# Altium PCB PCB1-ArduinoNano.PcbDoc
Units mm, origin at the board's own origin, x right, y up, seen from the top; angles counter-clockwise.
Board outline 18 x 45 mm, 4 copper layers (Top Layer, Signal Layer Top, Signal Layer Bottom, Bottom Layer), stack 0.603 mm thick; 30 components, 44 nets, 163 pads, 34 vias.
Unrouted connection lines stored in the file: 14.
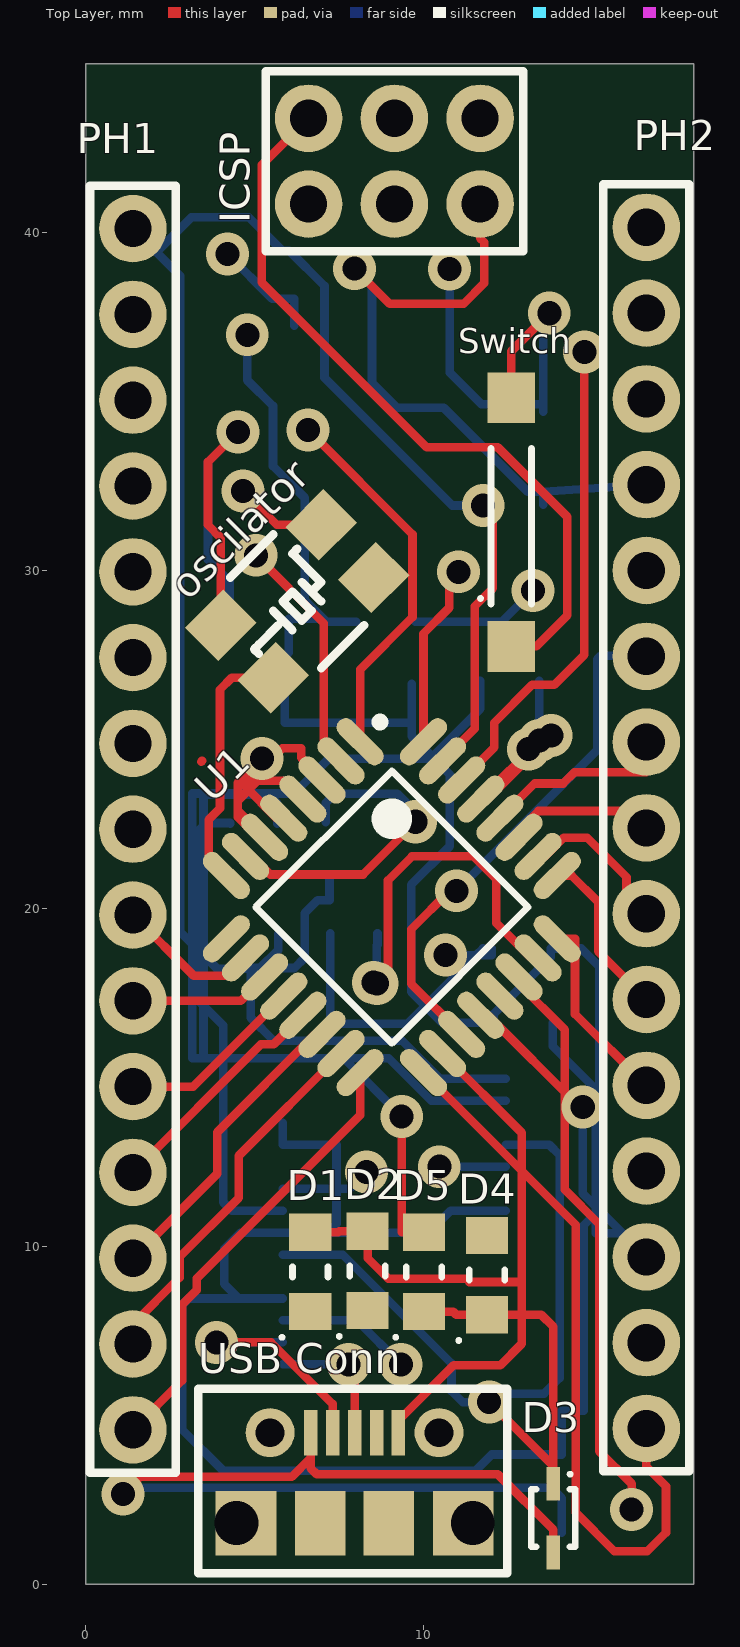
[diagram p0: Top Layer view]
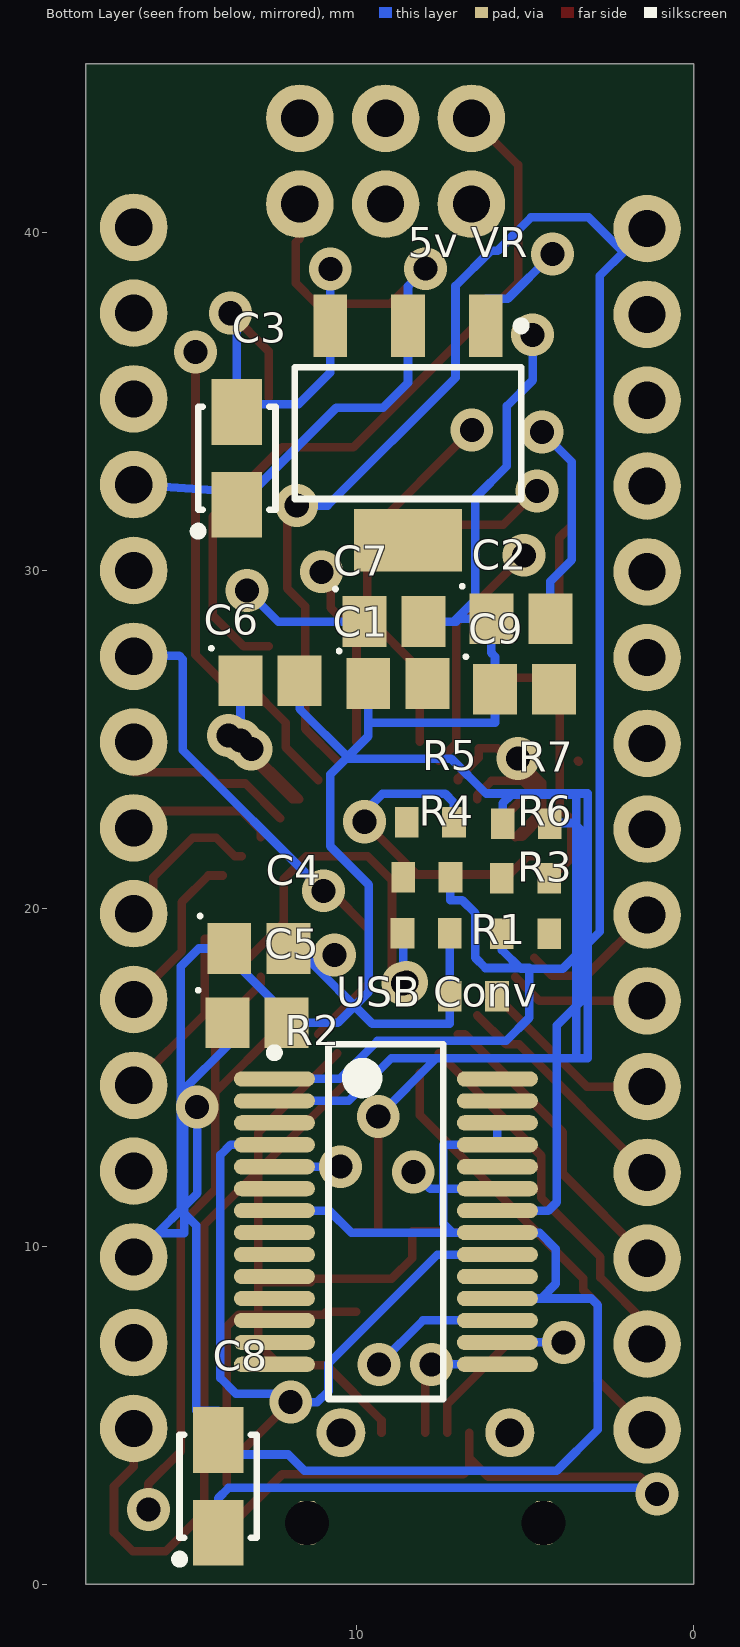
[diagram p1: Bottom Layer view, seen from below]
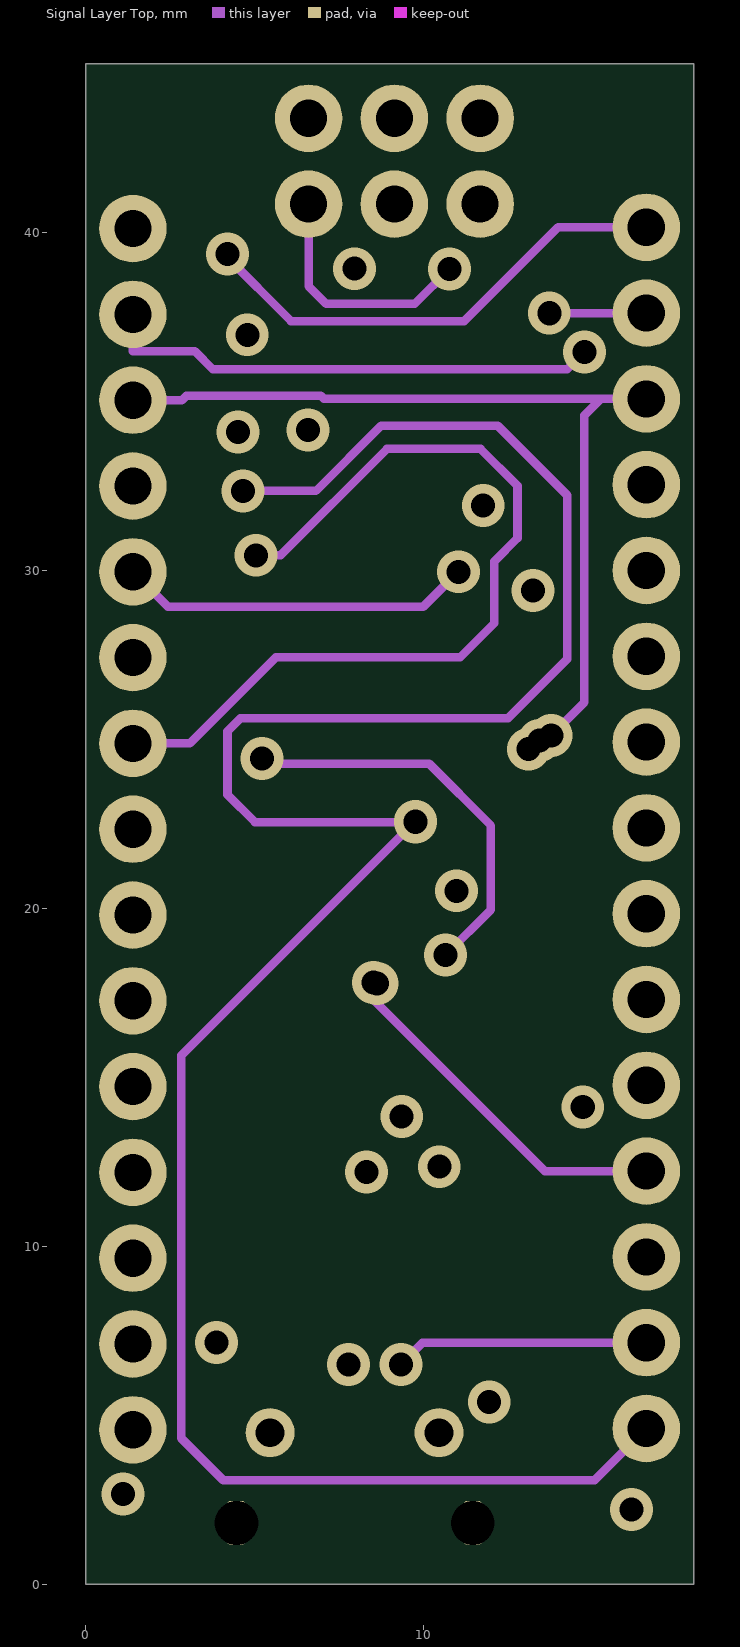
[diagram p2: Signal Layer Top]
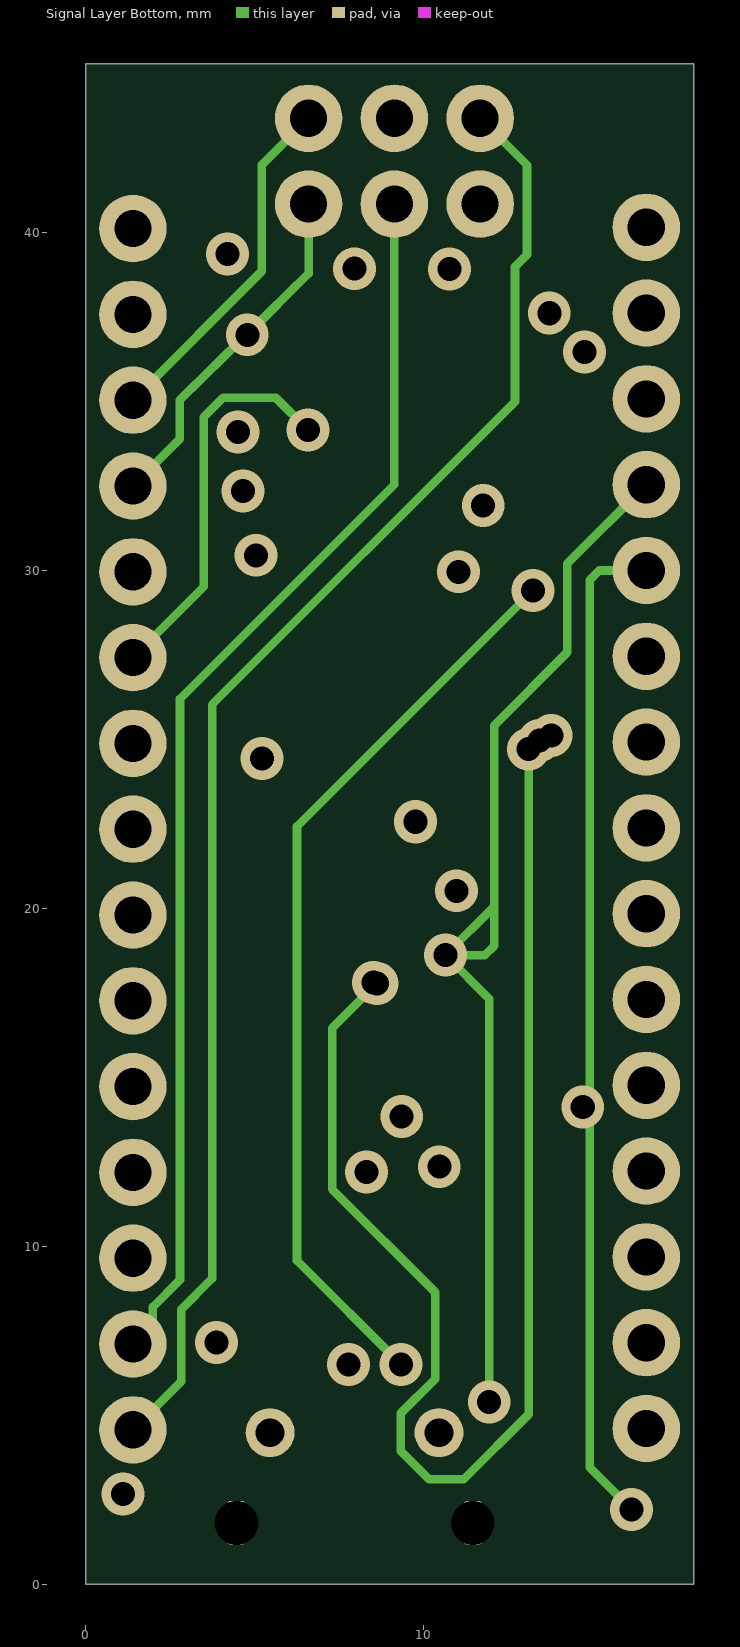
[diagram p3: Signal Layer Bottom]

## Layer stack, top to bottom
Top Solder: solder mask 0.0102, Solder Resist, Dk 3.5
Top Layer: signal copper 0.0356
Dielectric 1: prepreg 0.0711, PP-006, Dk 4.1
Signal Layer Top: signal copper 0.035
Dielectric 3: dielectric 0.32, FR-4, Dk 4.8
Signal Layer Bottom: signal copper 0.035
Dielectric 2: prepreg 0.0711, PP-006, Dk 4.1
Bottom Layer: signal copper 0.0356
Bottom Solder: solder mask 0.0102, Solder Resist, Dk 3.5

## Board outline
0,0 0,45 18,45 18,0

## Design rules (kind name [scope] priority, off if disabled: settings)
Clearance [All] p1: gap=0.254 ignorepadtopadclearanceinfootprint=FALSE
PolygonConnect [All] p1: connectstyle=Relief reliefconductorwidth=0.254 reliefentries=4 polygonreliefangle="90 Angle" airgapwidth=0.254
RoutingVias [All] p1: holewidth=0.711 width=1.27 viastyle="Through Hole" minholewidth=0.711 minwidth=1.27 maxholewidth=0.711 maxwidth=1.27
SolderMaskExpansion [All] p1: expansion=0.102 istentingtop=FALSE
SupplyNets "Schematic Supply Nets_4" [InNet('GND')] p1: voltage=0.000
SupplyNets "Schematic Supply Nets_3" [InNet('VUSB')] p2: voltage=0.000
SupplyNets "Schematic Supply Nets_2" [InNet('3V3')] p3: voltage=0.000
SupplyNets "Schematic Supply Nets_1" [InNet('+5')] p4: voltage=0.000
SupplyNets "Schematic Supply Nets" [InNet('VIN')] p5: voltage=0.000
Width [All] p1: maxlimit=0.254 minlimit=0.254 preferedwidth=0.254
30 further rules are at their usual default settings.

## Components (designator, comment, footprint, x,y, rotation, side; value= is the part's Value field where it differs from the comment)
"5v VR" "LM1117MP-5.0/NOPB, Low Dropout Voltage Regulator, 1.5A, 5 V ±1%, 4-Pin SOT-223" SOT230P700X180-4N 8.467,34.072 r270 bottom
C1 "C0805C180J5GACTU" CAPCP2012X09N 8.767,26.657 r180 bottom
C2 "C0805C180J5GACTU" CAPCP2012X09N 5.124,28.576 r180 bottom
C3 "Capacitor SMT Tantalum" "CASE A - 3216X18" 13.536,33.326 r90 bottom value=4.7µF
C4 "100nF Ceramic Multilayer Capacitor_1" CAPCP2012X09N 12.883,18.815 r180 bottom
C5 "100nF Ceramic Multilayer Capacitor_1" CAPCP2012X09N 12.939,16.618 r180 bottom
C6 "100nF Ceramic Multilayer Capacitor_1" CAPCP2012X09N 12.55,26.741 r180 bottom
C7 "100nF Ceramic Multilayer Capacitor_1" CAPCP2012X09N 8.879,28.493 r180 bottom
C8 "Capacitor SMT Tantalum" "CASE A - 3216X18" 14.085,2.894 r90 bottom value=4.7µF
C9 "100nF Ceramic Multilayer Capacitor_1" CAPCP2012X09N 5.015,26.49 r180 bottom
D1 "(power)Kingbright Blue LED, 60 mcd 120 ° 0805" LED1913X12NBLUE 6.641,9.241 r90 top
D2 "(D13 led) Kingbright Orange LED, 200 mcd 120 ° 0805" LED1913X12NYEL/ORANGE 8.337,9.269 r90 top
D3 "Panasonic DB2J20900L Schottky Diode, 0.5A, 20V, 2.4ns, 2-Pin SMini2 F5 B" DIOM1712X07N 13.832,1.953 r270 top
D4 "(TX)Kingbright Red LED, 100 mcd 120 ° 0805" LED1913X12NRED 11.873,9.148 r90 top
D5 "(RX)Kingbright Green LED, 70 mcd 120 ° 0805" LED1913X12NGREEN 10.006,9.241 r90 top
ICSP "Programming Headers Dual Row" "ISP HEADER" 29.323,29.294 r180 top
oscilator "Aker 16MHz Crystal SMT" "Aker S5C Crystal" 6.96,31.353 r45 top value=16MHz
PH1 "connector;str header;single row;.1 cont centers;.095 tail;gold or gtx;36 contact" Header 1.39,40.127 r270 top
PH2 "connector;str header;single row;.1 cont centers;.095 tail;gold or gtx;36 contact" Header 16.587,40.165 r270 top
R1 "330 (regulator)" RESC1608X55X25NL10T15 6.533,17.405 r180 bottom
R2 "1k" RESC1608X55X25NL10T15 7.931,19.269 r180 bottom
R3 "1k" RESC1608X55X25NL10T15 4.987,19.247 r180 bottom
R4 "1k" RESC1608X55X25NL10T15 7.91,20.92 r180 bottom
R5 "330" RESC1608X55X25NL10T15 7.804,22.551 r180 bottom
R6 "1K" RESC1608X55X25NL10T15 4.987,20.899 r180 bottom
R7 "1K" RESC1608X55X25NL10T15 4.966,22.509 r180 bottom
Switch "Button Tactile Switch, NO 0.05 A 0.8mm" Button8014X17N 12.593,31.313 r90 top
U1 "ATMEGA328P-AU" TQFP80P900X900X120-32N 9.054,20.038 r315 top
"USB Conn" "NewMolex Right Angle SMT Female Type B Micro USB Connector, 30 V ac, 1.8A" MicroUSB 6.721,4.48 r0 top
"USB Conv" "FT232RL, Universal Asynchronous Receiver & Transmitter 3MBd, 28-Pin, SSOP" SOP65P780X200-28N 9.122,10.729 r180 bottom

## Footprints (in the part's own frame and the unit in brackets; to place one, negate y for a bottom-side part, rotate by r counter-clockwise, add the part's x,y. Pads: shape width x height; smd on the part's side, far side on the other; paste and mask are expansions set on the pad)
"Aker S5C Crystal" [mm]
  rect 1.6x1.4 smd: 1(0,0) 2(-4.2,0) 3(0,-2.2) 4(-4.2,-2.2)
  round 0.254 on Top Overlay: 5(-3,-2.4)
  silkscreen extent -4,-3 -1,0.8, body extent -4.7,-2.8 0.5,0.6, height 1
Button8014X17N [mm] "Chip Inductor, 2-Leads, Body 8.00x1.40mm, IPC Medium Density"
  rect 1.5x1.4 smd: 1(-3.556,0) 2(3.81,0)
  silkscreen extent -2.3,-0.6 2.3,0.96, body extent -3.79,-1.92 4.21,1.78, height 2.5
CAPCP2012X09N [mm] "Chip Capacitor, 2-Leads, Body 2.00x1.25mm, IPC Medium Density"
  rect 1.3x1.5 smd: 1(-0.875,0) 2(0.875,0)
  silkscreen extent -1.79,0.91 -1.69,1.01, body extent -1.05,-0.57 0.95,0.68, height 0.78
"CASE A - 3216X18" [mm] "Molded Capacitor, 2-Leads, Body 3.2x1.6mm, IPC Medium Density"
  rect 1.95x1.5 smd: 1(-1.375,0) 2(1.375,0)
  silkscreen extent -2.28,-1.14 1.52,1.27, body extent -1.52,-0.76 1.65,0.84, height 1.77
DIOM1712X07N [mm] "Molded Diode, 2-Leads, Body 1.70x1.25mm, IPC Medium Density"
  rect 1x0.4 smd: 1(-1.016,0) 2(1.016,0)
  silkscreen extent -1.35,-0.65 0.85,0.65, body extent -0.9,-0.45 0.9,0.45, height 0.8
Header [mm] "SIL Header"
  round 2 hole 1.1: 1(0,0) 2(2.54,0) 3(5.08,0) 4(7.62,0) 5(10.16,0) 6(12.7,0) 7(15.24,0) 8(17.78,0) 9(20.32,0) 10(22.86,0) 11(25.4,0) 12(27.94,0) 13(30.48,0) 14(33.02,0) 15(35.56,0)
  silkscreen extent -1.27,-1.27 36.83,1.27, body extent -1.33,-1.35 36.93,1.35, height 8.6
"ISP HEADER" [mm] "SIL Header for programming"
  round 2 hole 1.1: 1(17.653,-14.097) 2(17.653,-11.557) 3(20.193,-14.097) 4(20.193,-11.557) 5(22.733,-14.097) 6(22.733,-11.557)
  silkscreen extent 16.38,-15.49 24,-10.16, body extent 16.38,-15.37 24,-10.29, height 8
LED1913X12NBLUE [mm] "LED 2-Leads, Body 1.90x1.32mm, IPC Medium Density"
  rect 1.1x1.25 smd: 1(-1.175,0) 2(1.175,0)
  silkscreen extent -1.99,-0.52 0.15,0.89, body extent -1,-0.62 1.02,0.62, height 1.1
LED1913X12NGREEN [mm] "LED 2-Leads, Body 1.90x1.32mm, IPC Medium Density"
  rect 1.1x1.25 smd: 1(-1.175,0) 2(1.175,0)
  silkscreen extent -1.99,-0.53 0.15,0.89, body extent -1.01,-0.62 1.01,0.63, height 1.1
LED1913X12NRED [mm] "LED 2-Leads, Body 1.90x1.32mm, IPC Medium Density"
  rect 1.1x1.25 smd: 1(-1.175,0) 2(1.175,0)
  silkscreen extent -1.99,-0.53 0.15,0.89, body extent -1.02,-0.43 1.04,0.47, height 0.85
LED1913X12NYEL/ORANGE [mm] "LED 2-Leads, Body 1.90x1.32mm, IPC Medium Density"
  rect 1.1x1.25 smd: 1(-1.175,0) 2(1.175,0)
  silkscreen extent -1.99,-0.53 0.15,0.89, body extent -1.01,-0.62 1.01,0.63, height 1.1
MicroUSB [mm] "MicroUSB  Molex 5Pin"
  rect 0.4x1.35 smd: 1(-0.07,0) 2(0.58,0) 3(1.23,0) 4(1.88,0) 5(2.53,0)
  rrect50% 0.6x1.3 hole 1.3: ""(-2.27,-2.667) ""(-2.27,-2.667) ""(4.73,-2.667)
  rect 1.8x1.9 smd: ""(-1.98,-2.678) ""(4.45,-2.678)
  round 1.45 hole 0.85: ""(-1.27,0) ""(3.73,0)
  rect 1.5x1.9 smd: ""(0.218,-2.678) ""(2.242,-2.678)
  silkscreen extent -3.39,-4.17 5.75,1.3, body extent -2.83,-5.32 5.37,0.11, height 2.68
RESC1608X55X25NL10T15 [mm] "Chip Resistor, 2-Leads, Body 1.70x0.90mm, IPC Medium Density"
  rect 0.7x0.9 smd: 1(-0.7,0) 2(0.7,0)
  body extent -0.85,-0.45 0.85,0.45, height 0.55
SOP65P780X200-28N [mm] "SOP, 28-Leads, Body 10.20x5.30mm, Pitch 0.65mm, IPC Medium Density"
  oval 2.4x0.45 smd: 1(-3.3,4.225) 2(-3.3,3.575) 3(-3.3,2.925) 4(-3.3,2.275) 5(-3.3,1.625) 6(-3.3,0.975) 7(-3.3,0.325) 8(-3.3,-0.325) 9(-3.3,-0.975) 10(-3.3,-1.625) 11(-3.3,-2.275) 12(-3.3,-2.925) 13(-3.3,-3.575) 14(-3.3,-4.225) 15(3.3,-4.225) 16(3.3,-3.575) 17(3.3,-2.925) 18(3.3,-2.275) 19(3.3,-1.625) 20(3.3,-0.975) 21(3.3,-0.325) 22(3.3,0.325) 23(3.3,0.975) 24(3.3,1.625) 25(3.3,2.275) 26(3.3,2.925) 27(3.3,3.575) 28(3.3,4.225)
  silkscreen extent -3.43,-5.25 1.7,5.25, body extent -3.91,-5.1 3.91,5.1, height 2
SOT230P700X180-4N [mm] "SOT223, 4-Leads, Body 6.50x7.00mm (avg), Pitch 2.30mm, IPC Medium Density"
  rect 1.85x1 smd: 1(-3.175,2.3) 2(-3.175,0) 3(-3.175,-2.3)
  rect 1.85x3.2 smd: 4(3.175,0)
  silkscreen extent -3.3,-3.35 1.95,3.47, body extent -3.8,-3.12 3.29,3.38, height 1.65
TQFP80P900X900X120-32N [mm] "TQFP, 32-Leads, Body 7.00x7.00mm, Pitch 0.80mm, IPC Medium Density"
  oval 1.75x0.55 smd: 1(-4.125,2.8) 2(-4.125,2) 3(-4.125,1.2) 4(-4.125,0.4) 5(-4.125,-0.4) 6(-4.125,-1.2) 7(-4.125,-2) 8(-4.125,-2.8) 17(4.125,-2.8) 18(4.125,-2) 19(4.125,-1.2) 20(4.125,-0.4) 21(4.125,0.4) 22(4.125,1.2) 23(4.125,2) 24(4.125,2.8)
  oval 0.55x1.75 smd: 9(-2.8,-4.125) 10(-2,-4.125) 11(-1.2,-4.125) 12(-0.4,-4.125) 13(0.4,-4.125) 14(1.2,-4.125) 15(2,-4.125) 16(2.8,-4.125) 25(2.8,4.125) 26(2,4.125) 27(1.2,4.125) 28(0.4,4.125) 29(-0.4,4.125) 30(-1.2,4.125) 31(-2,4.125) 32(-2.8,4.125)
  silkscreen extent -4.25,-2.85 2.85,3.75, body extent -4.44,-4.5 4.56,4.5, height 1.6

## Part data
"5v VR": library part LM1117MP-5.0, Manufacturer="Texas Instruments", Maximum Input Voltage=15V, Output Voltage=5V, Supply Current=1.5Amps, Created By="R Kanjee", Datasheet URL=http://za.rs-online.com/web/p/low-dropout-voltage-regulators/5339583/, Date Created="26 February 2015", RS Stock No.=533-9583
C1 C2: library part "18pF Ceramic Multilayer Capacitor, 50 V dc C0G Dielectric ±5% SMD", "18pF Ceramic Multilayer Capacitor, 50 V dc C0G Dielectric ±5% SMD", Capacitance=18pF, Manufacturer=Kemet, Package=0805, Voltage=50V, Creator="Ritesh Kanjee", Datasheet URL=http://za.rs-online.com/web/p/ceramic-multilayer-capacitors/6480935/?searchTerm=C0805C180J5GACTU&relevancy-data=636F3D3226696E3D4931384E4B6E6F776E41734D504E266C753D656E266D6D3D6D61746368616C6C7061727469616C26706D3D5E5B5C707B4C7D5C707B4E647D2D2C2F255C2E5D2B2426706F3D313326736E3D592673743D4D414E5F504152545F4E554D4245522677633D424F5448267573743D4330383035433138304A35474143545526, Date Created="18 February 2015", RS Stock No.=648-0935
C3 C8: library part "4.7µF Tant RS 496-3545", "Capacitor,tantalum,SMT,16V,4.7uF,10%,A-case", Package=3216-18, Tolerance=10%, Voltage=16V, ComponentLink1Description="Supplier Website", ComponentLink1URL=http://za.rs-online.com/web/search/searchBrowseAction.html?method=getProduct&R=4963545, ComponentLink2Description="RS Data sheet", ComponentLink2URL=http://docs-europe.origin.electrocomponents.com/webdocs/04ed/0900766b804ed4cc.pdf, LatestRevisionDate=28-April-2010, Part Originator="H Theron", Publisher=DPSS, RS Stock Nr.=496-3545
C4 C5 C6 C7 C9: "AVX 0805 Standard 100nF Ceramic Multilayer Capacitor, 50 V dc X7R Dielectric ±10% SMD", Capacitance=100nF, Manufacturer=AVX, Package=0805, Voltage=50V, Creator="Ritesh Kanjee", Datasheet URL=http://za.rs-online.com/web/p/ceramic-multilayer-capacitors/4646688/, Date Created="18 February 2015", RS Stock No.=464-6688
D1: library part "Kingbright Blue LED, 60 mcd 120 ° 0805", "Kingbright Blue LED, 60 mcd 120 ° 0805", Color=Blue, Forward Voltage=3.2V, Manufacturer=KingBright, Manufacturer Part No.=KP-2012PBC-A, Creator="Ritesh Kanjee", Datasheet URL=http://za.rs-online.com/web/p/visible-leds/4663784/, Date Created="18 February 2015", RS Stock No.=466-3784
D2: library part "Kingbright Orange LED, 200 mcd 120 ° 0805", "Kingbright Orange LED, 200 mcd 120 ° 0805", Color=Orange, Forward Voltage=1.85V, Manufacturer=KingBright, Manufacturer Part No.=KP-2012SEC, Creator="Ritesh Kanjee", Datasheet URL=http://za.rs-online.com/web/p/visible-leds/4663790/, Date Created="18 February 2015", RS Stock No.=466-3790
D3: library part "Schottky Diode, 0.5A, 20V, 2.4ns, 2-Pin SMini2 F5 B", Manufacturer=Panasonic, Manufacturer Part No.=DB2J20900L, Maximum Continuous Forward Current=0.5A, Peak Reverse Repetitive Voltage=20V, Created By="R Kanjee", Datasheet=http://docs-europe.electrocomponents.com/webdocs/1398/0900766b813986b3.pdf, Date Created="1 March 2015", RS Stock No.=713-2703
D4: library part "Kingbright Red LED, 100 mcd 120 ° 0805", "Kingbright Red LED, 100 mcd 120 ° 0805", Color=RED, Forward Voltage=1.85V, Manufacturer=KingBright, Manufacturer Part No.=KP-2012SRC-PRV, Creator="Ritesh Kanjee", Datasheet URL=http://za.rs-online.com/web/p/visible-leds/4663813/, Date Created="18 February 2015", RS Stock No.=466-3813
D5: library part "Kingbright Green LED, 70 mcd 120 ° 0805", "Kingbright Green LED, 70 mcd 120 ° 0805", Color=Green, Forward Voltage="2.1 V", Manufacturer=KingBright, Manufacturer Part No.=KP-2012MGC, Creator="Ritesh Kanjee", Datasheet URL=http://za.rs-online.com/web/p/visible-leds/4663778/, Date Created="18 February 2015", RS Stock No.=466-3778
ICSP: library part "Programming ISP, Programming Headers Dual Row", Current Rating="3Amps Continuous", Manufacturer=FCI, Manufacturer Part No.=68000-236HLF, Created By="R Kanjee", Date Created="1 March 2015", RS Stock No.=2509565626
oscilator: library part "Aker  C5S-16.000-12-3030-X", "Aker S5C SMT Crystal", Frequency Stability=+/-30ppm, Load Capacitance=12pF, Manufacturer=Aker, Manufacturer Part #=C5S-16.000-12-3030-X, Package="3.2x5mm SMD", Creator="R Kanjee", HelpURL=http://za.rs-online.com/web/p/crystal-units/6719488/, RS="RS 671-9488", RS Stock Nr.=671-9488, Supplier=RS
PH1 PH2: library part "Single row; PCB headers", Current Rating="3Amps Continuous", Manufacturer=FCI, Manufacturer Part No.=68000-236HLF, Created By="R Kanjee", Date Created="1 March 2015", RS Stock No.=2509565626
R1 R5: library part CMP-2100-03667-1, "Chip Resistor, 0 Ohm, +/- 5%, 0.1 W, -55 to 155 degC, 0603 (1608 Metric), RoHS, Tape and Reel", Case Code (Imperial)=0603, Case Code (Metric)=1608, Manufacturer=Yageo, Max Operating Temperature=155degC, Min Operating Temperature=-55degC, Package Description="2-Pin Surface Mount Device, Body 1.6 x 0.8 mm", Package Quantity=5000, Power Rating=100mW, Resistance=330mOhm, Temperature Coefficient=200ppm/degreesC, Tolerance=5%, Voltage Rating=50V, Case/Package=0603, Composition=ThickFilm, Contact Plating=Tin, Datasheet URL=http://www.yageo.com/NewPortal/yageodocoutput?fileName=/pdf/R-Chip/PYu-RC_Group_51_RoHS_L_5.pdf, Datasheet Version="Rev. 5, 10/2016", Depth=0.8mm, Height=0.45mm, Lead Free=LeadFree, Length=1.6mm, Manufacturer URL=http://www.yageo.com/, Military Standard=Not, Number of Pins=2, Package Reference=0603, Packaging=TapeandReel, Radiation Hardening=No, REACH SVHC=NoSVHC, RoHSCompliant=true, Termination=SMD/SMT, Voltage Rating (DC)=50V, Width=0.8mm
R2 R3 R4: library part CMP-2100-03667-1, "Chip Resistor, 0 Ohm, +/- 5%, 0.1 W, -55 to 155 degC, 0603 (1608 Metric), RoHS, Tape and Reel", Case Code (Imperial)=0603, Case Code (Metric)=1608, Manufacturer=Yageo, Max Operating Temperature=155degC, Min Operating Temperature=-55degC, Package Description="2-Pin Surface Mount Device, Body 1.6 x 0.8 mm", Package Quantity=5000, Power Rating=100mW, Resistance=1K, Temperature Coefficient=200ppm/degreesC, Tolerance=5%, Voltage Rating=50V, Case/Package=0603, Composition=ThickFilm, Contact Plating=Tin, Datasheet URL=http://www.yageo.com/NewPortal/yageodocoutput?fileName=/pdf/R-Chip/PYu-RC_Group_51_RoHS_L_5.pdf, Datasheet Version="Rev. 5, 10/2016", Depth=0.8mm, Height=0.45mm, Lead Free=LeadFree, Length=1.6mm, Manufacturer URL=http://www.yageo.com/, Military Standard=Not, Number of Pins=2, Package Reference=0603, Packaging=TapeandReel, Radiation Hardening=No, REACH SVHC=NoSVHC, RoHSCompliant=true, Termination=SMD/SMT, Voltage Rating (DC)=50V, Width=0.8mm
R6 R7: library part CMP-2100-03667-1, "Chip Resistor, 0 Ohm, +/- 5%, 0.1 W, -55 to 155 degC, 0603 (1608 Metric), RoHS, Tape and Reel", Case Code (Imperial)=0603, Case Code (Metric)=1608, Manufacturer=Yageo, Max Operating Temperature=155degC, Min Operating Temperature=-55degC, Package Description="2-Pin Surface Mount Device, Body 1.6 x 0.8 mm", Package Quantity=5000, Power Rating=100mW, Temperature Coefficient=200ppm/degreesC, Tolerance=5%, Voltage Rating=50V, Case/Package=0603, Composition=ThickFilm, Contact Plating=Tin, Datasheet URL=http://www.yageo.com/NewPortal/yageodocoutput?fileName=/pdf/R-Chip/PYu-RC_Group_51_RoHS_L_5.pdf, Datasheet Version="Rev. 5, 10/2016", Depth=0.8mm, Height=0.45mm, Lead Free=LeadFree, Length=1.6mm, Manufacturer URL=http://www.yageo.com/, Military Standard=Not, Number of Pins=2, Package Reference=0603, Packaging=TapeandReel, Radiation Hardening=No, REACH SVHC=NoSVHC, Resistance=1K, RoHSCompliant=true, Termination=SMD/SMT, Voltage Rating (DC)=50V, Width=0.8mm
Switch: Manufacturer="C & K", Manufacturer Part No.=B3F1000, Creator="R Kanjee", Date Created="25 February 2015", RS Stock No.=516-255, State="Normaly Open"
U1: "ATMEGA328P-AU, 8 bit AVR Microcontroller 20MHz 1 kB, 32 kB Flash, 2 kB RAM, I2C 32-Pin TQFP", Company="Lumina Inova", Created By="Ritesh Kanjee", Datasheet URL=http://docs-europe.electrocomponents.com/webdocs/0db4/0900766b80db4deb.pdf, Date Created="14 February 2015", RS Stock No.=696-3092
"USB Conn": library part "Micro USB Connector, 30 V ac, 1.8A", Manufacturer=Molex, Manufacturer Part No.=105017-0001, Max Current=1.8A, Max Voltage=30V, Creator="R Kanjee", Datasheet URL=http://za.rs-online.com/web/p/micro-usb-connectors/8486764/, Date Created="28 February 2015", RS Stock No=848-6764
"USB Conv": library part "FT232RL USB to UART, Universal Asynchronous Receiver & Transmitter 3MBd, 28-Pin, SSOP", Manufacturer="FTDI Chip", Manufacturer Part No.=FT232RL, Creator="R Kanjee", Date Created="03 March 2015", Pin Count=28, RS Stock No.=406-580

## Via types
v1: diameter 1.27, hole 0.711, Top Layer to Bottom Layer, 34 vias

## Nets (pads, with @x,y where several pads share a name; then routed paths per layer and width w, separated by ;. In a path a pad name is that pad's centre, name@x,y a point inside that pad or via, vN(x,y) a via of type N, cw(c..) or ccw(c..) an arc to the next point about the centre after c; other vN are vias at no path point)
3V3: "USB Conv.17" C7.1 PH2.14 | length 42.5
  Signal Layer Top w0.254: v1(9.322,6.504) 9.963,7.145 PH2.14
  Signal Layer Bottom w0.254: v1(9.322,6.504) 6.248,9.577 6.248,22.428 v1(13.233,29.413)
  Bottom Layer w0.254: 5.822,7.804 8.022,7.804 v1(9.322,6.504) ; C7.1 12.313,28.493 v1(13.233,29.413)
+5: "5v VR.2" "USB Conv.4" "USB Conv.20" C3.1 C4.2 D3.1 D4.1 D5.1 ICSP.2 PH2.4 R1.1 R2.2 U1.4 U1.6 U1.18 | length 121
  Top Layer w0.254: v1(5.207,24.435) 4.496,23.724 4.496,23.19 ; U1.4 6.42,23.348 5.994,23.774 5.08,23.774 4.496,23.19 ; v1(7.95,38.938) 8.992,37.897 11.176,37.897 11.786,38.506 11.786,39.726 11.67,39.841 ICSP.2 ; D5.1 10.871,8.066 10.964,7.973 D4.1 12.903,7.973 ; U1.18 12.903,13.361 12.903,7.973 ; v1(11.938,5.385) 13.832,3.49 ; D3.1 13.832,3.49 ; 4.496,22.9 4.496,23.19 ; 4.496,22.9 4.496,22.708 5.08,22.123 U1.6@5.272,22.123 ; 4.496,22.9 U1.6@5.272,22.123 ; U1.6@5.272,22.123 5.289,22.123 U1.6 U1.6@5.272,22.123 ; 12.903,7.973 13.48,7.973 13.832,7.62 13.832,3.49
  Signal Layer Top w0.254: v1(5.207,24.435) 5.207,24.282 10.16,24.282 11.989,22.454 11.989,19.964 v1(10.643,18.618)
  Signal Layer Bottom w0.254: v1(11.938,5.385) 11.938,17.323 v1(10.643,18.618) ; PH2.4 14.249,30.208 14.249,27.584 12.09,25.425 12.09,20.066 ; v1(10.643,18.618) 12.09,20.066 ; v1(10.643,18.618) 11.811,18.618 12.09,18.898 12.09,20.066
  Bottom Layer w0.254: 5.822,9.754 7.595,9.754 10.82,6.528 10.82,5.715 11.151,5.385 v1(11.938,5.385) 12.192,5.639 13.564,5.639 14.021,6.096 14.021,12.7 13.717,13.004 12.422,13.004 ; R2.2 7.231,18.756 7.233,18.753 R1.1 7.233,16.586 9.525,16.586 C4.2@11.557,18.618 ; v1(7.95,38.938) 8.467,38.422 8.467,37.247 8.467,35.56 9.203,34.823 10.592,34.823 13.08,32.335 C3.1@13.536,32.335 ; v1(10.643,18.618) C4.2@11.557,18.618 ; C4.2 12.008,18.618 C4.2@11.753,18.618 ; C3.1 C3.1@13.536,32.335 ; PH2.4 C3.1@13.536,32.335 ; C4.2@11.557,18.618 11.753,18.815 C4.2@11.753,18.618 ; C4.2@11.557,18.618 C4.2@11.753,18.618
A0: PH2.12 U1.23 | length 20.6
  Top Layer w0.254: v1(8.509,17.805) 8.941,18.237 8.941,20.828 9.652,21.539 11.481,21.539 12.147,20.873 12.147,19.57 13.182,18.536 U1.23
  Signal Layer Top w0.254: v1(8.509,17.805) 8.509,17.297 13.581,12.225 PH2.12
A1: PH2.11 U1.24 | length 5.7
  Top Layer w0.254: U1.24 14.478,19.101 14.478,16.874 PH2.11
A2: PH2.10 U1.25 | length 5
  Top Layer w0.254: U1.25 14.375,20.975 15.164,20.187 15.164,18.728 PH2.10
A3: PH2.9 U1.26 | length 5
  Top Layer w0.254: U1.26 13.589,21.541 14.146,22.098 14.834,22.098 16.002,20.93 16.002,19.845 PH2.9
A4: PH2.8 U1.27 | length 4.4
  Top Layer w0.254: U1.27 12.82,22.31 13.395,22.885 16.087,22.885 PH2.8
A5: PH2.7 U1.28 | length 5.8
  Top Layer w0.254: U1.28 13.28,23.698 14.122,23.698 14.453,24.028 16.587,24.028 PH2.7
A6: PH2.6 U1.19 | length 15.6
  Top Layer w0.254: v1(10.973,20.523) 10.769,20.523 9.627,19.381 9.627,17.769 U1.19
  Bottom Layer w0.254: v1(10.973,20.523) 15.138,24.689 15.138,27.381 15.24,27.483 16.587,27.483 PH2.6
A7: PH2.5 U1.22 | length 47
  Top Layer w0.254: U1.22 12.82,17.766 14.173,16.413 14.173,11.678 15.189,10.662 15.189,3.934 16.154,2.968 v1(16.154,2.21)
  Signal Layer Bottom w0.254: v1(16.154,2.21) 14.91,3.454 14.91,29.718 15.197,30.005 PH2.5
AREF: C5.1 PH2.13 U1.20 | length 16.9
  Top Layer w0.254: U1.20 11.892,16.839 14.608,14.122 v1(14.707,14.122)
  Bottom Layer w0.254: C5.1 13.814,15.926 15.088,14.652 15.088,11.185 ; v1(14.707,14.122) 14.707,11.566 15.088,11.185 ; PH2.13 PH2.13@15.884,10.389 ; 15.088,11.185 15.088,10.389 PH2.13@15.884,10.389 ; 15.088,11.185 PH2.13@15.884,10.389
D0/Rx: PH1.2 R4.1 U1.30 | length 29.5
  Top Layer w0.254: U1.30 12.09,24.771 12.09,25.502 13.208,26.619 13.868,26.619 14.757,27.508 v1(14.757,36.474)
  Signal Layer Top w0.254: PH1.2 1.39,36.5 3.221,36.5 3.762,35.959 14.242,35.959 v1(14.757,36.474)
D1/Tx: PH1.1 R3.1 U1.31 | length 49.2
  Top Layer w0.254: U1.31 11.506,25.319 11.506,28.94 12.04,29.473 12.04,31.928 v1(11.76,31.928)
  Bottom Layer w0.254: PH1.1 PH1.1@2.045,39.472 ; R3.1 5.687,18.771 5.129,18.212 3.886,18.212 2.794,19.304 2.794,38.723 PH1.1@2.045,39.472 ; v1(11.76,31.928) 10.846,31.928 7.061,35.712 7.061,38.43 6.02,39.472 5.811,39.472 4.825,40.458 3.119,40.458 2.132,39.472 PH1.1@2.045,39.472
D2: PH1.5 U1.32 | length 16
  Top Layer w0.254: U1.32 9.991,28.138 10.757,28.903 10.757,29.7 v1(11.024,29.967)
  Signal Layer Top w0.254: PH1.5 2.426,28.931 9.988,28.931 v1(11.024,29.967)
D3: PH1.6 U1.1 | length 22.9
  Top Layer w0.254: v1(6.579,34.163) 9.667,31.074 9.667,28.626 8.117,27.076 U1.1
  Signal Layer Bottom w0.254: PH1.6 3.482,29.519 3.482,34.544 4.059,35.121 5.621,35.121 v1(6.579,34.163)
D4: PH1.7 U1.2 | length 33.2
  Top Layer w0.254: v1(5.029,30.455) 7.036,28.448 7.036,24.885 U1.2
  Signal Layer Top w0.254: PH1.7 3.071,24.887 5.616,27.432 11.074,27.432 12.09,28.448 12.09,30.277 12.776,30.963 12.776,32.512 11.684,33.604 8.912,33.604 5.763,30.455 v1(5.029,30.455)
D5: PH1.8 U1.9 | length 0
  Top Layer w0.254: 3.411,24.342 ccw(c3.232,24.523) 3.435,24.369
D6: PH1.9 U1.10 | length 4.3
  Top Layer w0.254: PH1.9 3.188,18.009 4.196,18.009 U1.10
D7: PH1.10 U1.11 | length 4.2
  Top Layer w0.254: PH1.10 4.586,17.267 U1.11
D8: PH1.11 U1.12 | length 5.6
  Top Layer w0.254: PH1.11 3.177,14.727 U1.12
D9: PH1.12 U1.13 | length 7
  Top Layer w0.254: PH1.12 5.181,15.978 5.559,15.978 U1.13
D10: PH1.13 U1.14 | length 9.1
  Top Layer w0.254: PH1.13 3.886,12.143 3.886,13.377 6.783,16.273 U1.14
D11/MOSI: ICSP.4 PH1.14 U1.15 | length 48.1
  Top Layer w0.254: PH1.14 1.39,7.694 2.771,9.075 2.771,9.68 4.521,11.43 4.521,12.677 U1.15
  Signal Layer Bottom w0.254: PH1.14 1.981,7.698 1.981,8.204 2.784,9.007 2.784,26.203 9.13,32.549 ICSP.4
D12/MISO: ICSP.1 PH1.15 U1.16 | length 57.6
  Top Layer w0.254: PH1.15 2.845,6.021 2.845,8.268 3.279,8.703 3.279,9.045 8.117,13.883 U1.16
  Signal Layer Bottom w0.254: PH1.15 2.819,5.996 2.819,8.128 3.734,9.042 3.734,26.035 12.7,35.001 12.7,38.996 13.056,39.352 13.056,42.006 ICSP.1
D13/SCK: ICSP.3 PH2.15 R5.2 U1.17 | length 61.5
  Top Layer w0.254: U1.17 14.503,10.629 14.503,2.108 15.646,0.965 16.612,0.965 17.17,1.524 17.17,2.896 16.587,3.48 PH2.15
  Signal Layer Top w0.254: v1(9.754,22.581) 2.819,15.646 2.819,4.318 4.064,3.073 15.055,3.073 PH2.15
  Bottom Layer w0.254: R5.2 7.104,23.131 7.366,23.393 9.22,23.393 9.754,22.86 v1(9.754,22.581)
GND: "5v VR.3" "USB Conn.5" "USB Conv.7" "USB Conv.18" "USB Conv.21" "USB Conv.25" "USB Conv.26" C1.1 C2.1 C3.2 C4.1 C5.2 C7.2 C8.2 C9.1 D1.2 D2.2 ICSP.6 PH1.4 PH2.2 Switch.2 U1.3 U1.5 U1.21 | length 139.9
  Top Layer w0.254: U1.5 5.651,22.672 4.699,23.624 5.814,24.74 6.375,24.74 6.375,24.46 6.986,23.85 U1.3 ; D1.2 7.468,10.416 7.495,10.444 D2.2 8.337,9.652 8.947,9.042 11.252,9.042 11.354,8.941 12.903,8.941 12.903,7.112 12.268,6.477 10.884,6.477 9.251,4.844 9.251,4.48 ; Switch.2 12.593,36.496 v1(13.716,37.62)
  Signal Layer Top w0.254: ICSP.6 6.59,38.419 7.112,37.897 9.729,37.897 v1(10.767,38.934) ; v1(13.716,37.625) PH2.2
  Signal Layer Bottom w0.254: PH1.4 2.771,33.888 2.771,35.045 4.759,36.998 6.59,38.797 ; v1(4.775,36.982) 6.59,38.797 ; ICSP.6 6.59,38.797
  Bottom Layer w0.254: v1(4.775,36.982) 4.775,35.636 5.537,34.874 5.537,33.096 6.477,32.156 6.477,29.128 7.112,28.493 ; 5.822,8.454 4.526,8.454 ; 5.822,13.654 5.822,13.004 7.417,13.004 7.417,10.668 7.153,10.404 ; C7.2 7.112,28.493 ; C1.1 9.642,25.502 ; v1(10.767,38.934) 10.767,37.247 10.767,35.865 11.707,34.925 C3.2@13.536,34.925 ; 12.422,11.054 10.795,11.054 10.145,10.404 7.153,10.404 ; C3.2 C3.2@13.536,34.925 ; v1(13.716,37.62) v1@13.536,37.439 ; v1(13.716,37.625) 13.536,37.445 v1@13.536,37.439 ; 4.526,8.454 3.044,8.454 2.845,8.255 2.845,4.572 4.064,3.353 11.532,3.353 12.014,3.835 14.085,3.835 C8.2 14.085,5.131 14.732,5.131 14.732,10.617 15.189,11.074 15.189,18.288 14.663,18.815 C4.1 13.758,18.56 12.064,16.866 C5.2 10.542,16.618 9.627,17.533 9.627,20.701 10.77,21.844 10.77,23.968 9.642,25.095 9.642,25.502 ; 4.526,8.454 4.089,8.89 4.089,9.921 4.572,10.404 5.822,10.404 7.153,10.404 ; 7.112,28.493 7.043,28.493 6.96,28.576 C2.1 5.999,27.567 5.89,27.457 C9.1 5.89,25.502 9.642,25.502 ; C3.2@13.536,34.925 v1@13.536,37.439
NetC1_2: C1.2 oscilator.3
NetC2_2: C2.2 oscilator.2 | length 12.4
  Top Layer w0.254: oscilator.2 3.99,30.976 3.613,31.353 3.613,33.22 v1(4.498,34.105)
  Bottom Layer w0.254: C2.2 4.249,29.685 3.613,30.321 3.613,33.22 v1(4.498,34.105)
NetC6_2: "USB Conv.2" C6.2 | length 28
  Bottom Layer w0.254: C6.2 11.675,25.908 10.201,24.435 7.188,24.435 6.156,23.402 3.15,23.402 3.15,15.57 8.959,15.57 10.225,14.304 12.422,14.304
NetD1_1: D1.1 R1.2
NetD2_1: D2.1 R5.1
NetD4_2: D4.2 R6.1
NetD5_2: D5.2 R7.1 | length 21.4
  Top Layer w0.254: v1(9.347,13.843) 9.347,10.416 D5.2
  Bottom Layer w0.254: R7.1 5.666,23.114 5.412,23.368 3.48,23.368 3.48,15.57 7.62,15.57 v1(9.347,13.843)
NetR6_2: "USB Conv.23" R6.2 | length 2.7
  Bottom Layer w0.254: 5.822,11.704 7.812,11.704 v1(8.31,12.202)
NetR7_2: "USB Conv.22" R7.2 | length 14.2
  Bottom Layer w0.254: R7.2 4.266,22.53 3.556,22.53 3.302,22.276 3.302,17.297 4.064,16.535 4.064,11.303 4.313,11.054 5.822,11.054
"NetUSB Conn_2": "USB Conn.2" "USB Conv.16" | length 7
  Top Layer w0.254: v1(3.861,7.154) 5.482,7.154 7.301,5.334 7.301,4.48
  Bottom Layer w0.254: v1(3.861,7.154) 5.822,7.154
"NetUSB Conn_3": "USB Conn.3" "USB Conv.15" | length 4
  Top Layer w0.254: v1(7.772,6.504) 7.951,6.325 7.951,4.48
  Bottom Layer w0.254: 5.822,6.504 v1(7.772,6.504)
RESET: C6.1 ICSP.5 PH1.3 PH2.3 R2.1 Switch.1 U1.29 | length 108.4
  Top Layer w0.254: ICSP.5 5.207,42.009 5.207,38.532 10.084,33.655 12.192,33.655 14.249,31.598 14.249,28.677 13.33,27.757 Switch.1 ; v1(13.425,24.974) U1.29 11.892,23.238 v1(13.775,25.121)
  Signal Layer Top w0.254: PH1.3 2.842,35.047 2.974,35.179 6.954,35.179 7.048,35.085 15.24,35.085 ; v1(13.775,25.121) 14.757,26.103 14.757,34.603 15.24,35.085 ; PH2.3 15.24,35.085
  Signal Layer Bottom w0.254: PH1.3 5.207,38.864 5.207,42.009 ICSP.5 ; v1(8.611,17.78) 7.29,16.459 7.29,11.684 10.338,8.636 10.338,6.071 9.322,5.055 9.322,3.937 10.16,3.099 11.176,3.099 13.106,5.029 v1(13.106,24.714)
  Bottom Layer w0.254: v1(8.611,17.78) 8.611,18.903 8.631,18.923 R2.1 ; v1(13.106,24.714) v1@13.425,25.032 ; v1(13.425,24.974) v1@13.425,25.032 ; C6.1 13.425,25.121 v1@13.425,25.032
RX: "USB Conv.1" R4.2 | length 14.4
  Bottom Layer w0.254: R4.2 7.21,20.244 6.858,20.244 6.477,19.863 6.477,18.542 6.172,18.237 4.877,18.237 4.877,16.764 5.563,16.078 9.369,16.078 10.493,14.954 12.422,14.954
TX: "USB Conv.5" R3.2 | length 2
  Bottom Layer w0.254: v1(10.46,12.354) 12.422,12.354
VIN: "5v VR.1" PH2.1 | length 17.8
  Signal Layer Top w0.254: v1(4.191,39.37) 4.14,39.319 6.071,37.389 11.201,37.389 13.978,40.165 PH2.1
  Bottom Layer w0.254: v1(4.191,39.37) 5.512,38.049 6.167,38.049 6.167,37.247
VUSB: "USB Conn.1" C8.1 C9.2 D3.2 | length 29.9
  Top Layer w0.254: v1(1.092,2.667) 1.6,3.175 6.096,3.175 6.651,3.73 ; 6.651,4.48 6.651,3.73 ; D3.2 13.832,1.611 12.192,3.251 6.829,3.251 6.651,3.429 6.651,3.73
  Bottom Layer w0.254: v1(1.092,2.667) 1.27,2.845 13.78,2.845 14.085,2.54 C8.1
XTAL1: oscilator.1 U1.7 | length 43.4
  Top Layer w0.254: v1(4.648,32.36) 5.655,31.353 oscilator.1 ; U1.7 4.927,21.541 5.462,21.006 8.204,21.006 v1(9.754,22.555)
  Signal Layer Top w0.254: v1(4.648,32.36) 6.807,32.36 8.738,34.29 12.192,34.29 14.249,32.233 14.249,27.381 12.497,25.629 4.572,25.629 4.191,25.248 4.191,23.368 5.004,22.555 v1(9.754,22.555)
XTAL2: oscilator.4 U1.8 | length 7.6
  Top Layer w0.254: U1.8 3.632,21.501 3.632,22.631 3.969,22.968 3.969,26.478 4.318,26.828 oscilator.4
pads on no net: "5v VR.4" "USB Conn.4" "USB Conn." "USB Conv.3" "USB Conv.6" "USB Conv.8" "USB Conv.9" "USB Conv.10" "USB Conv.11" "USB Conv.12" "USB Conv.13" "USB Conv.14" "USB Conv.19" "USB Conv.24" "USB Conv.27" "USB Conv.28" oscilator.5

## Silkscreen, mask and mechanical layers (free items; w line width, h text height)
Mechanical 1:
  lines w0.152: 0,44.958 0,0 18,0 18,45 0,45